# Altium PCB Brake_Light.PcbDoc
Units mm, origin at the board's own origin, x right, y up, seen from the top; angles counter-clockwise.
Board outline 164.75 x 15 mm, 4 copper layers (Top Layer, PWR, GND, Bottom Layer), stack 1.554 mm thick; 31 components, 22 nets, 81 pads, 189 vias.
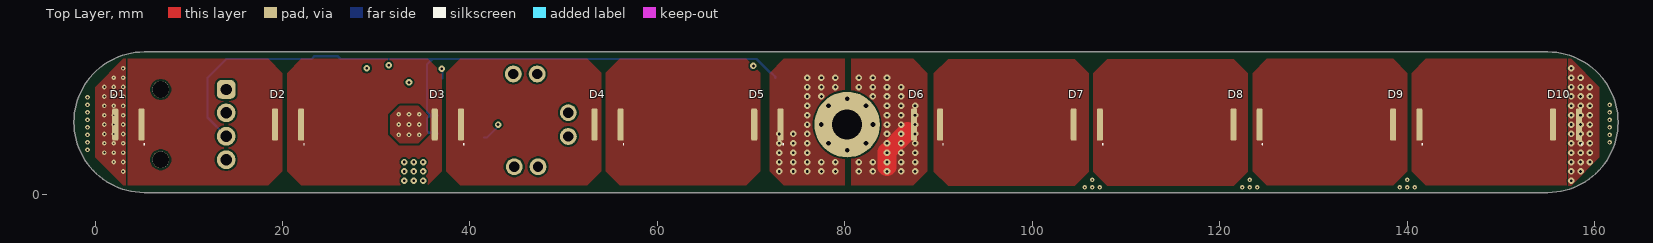
[diagram p0: Top Layer view]
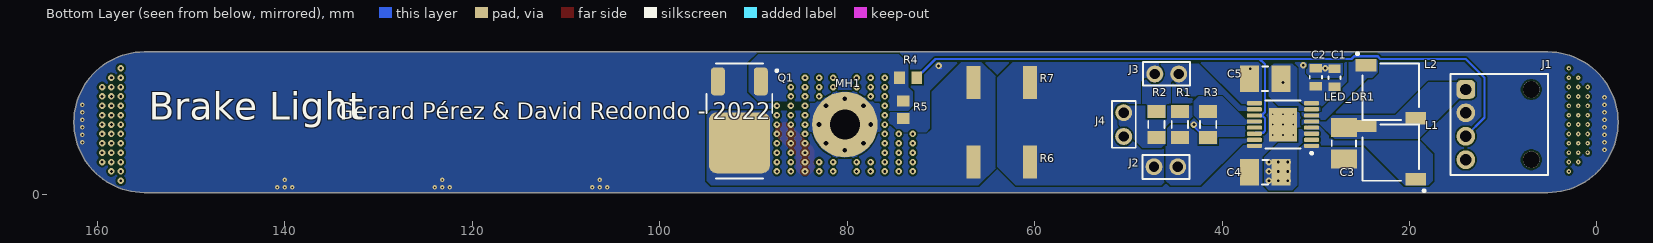
[diagram p1: Bottom Layer view, seen from below]
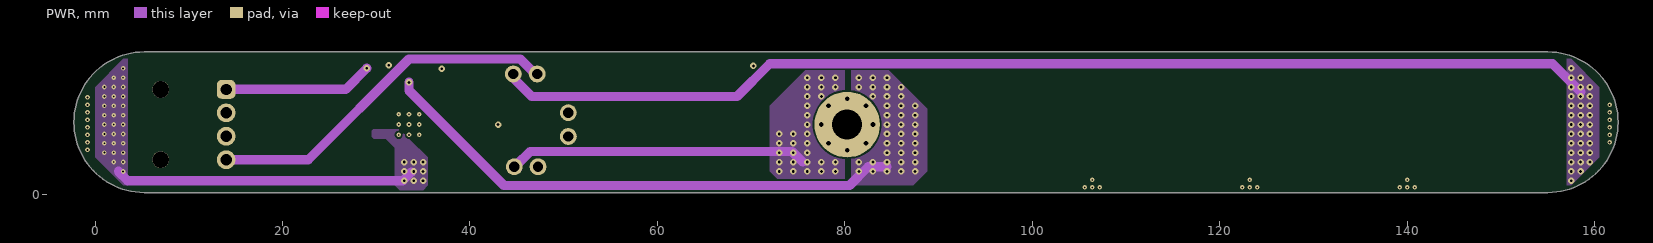
[diagram p2: PWR]
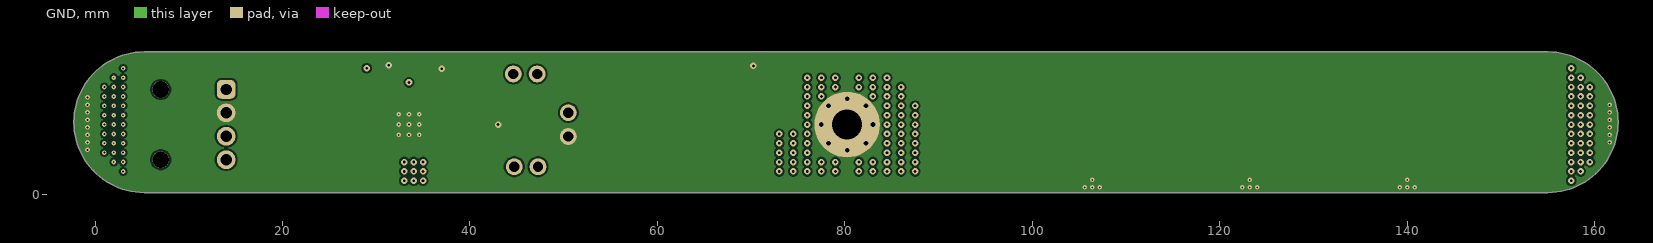
[diagram p3: GND]
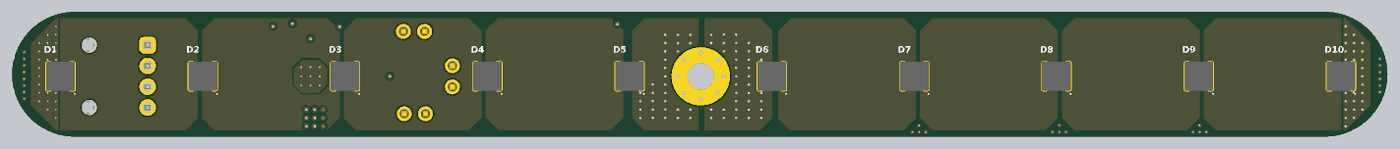
[diagram p4: 3D render of the assembled board from above, using the file's embedded part models]
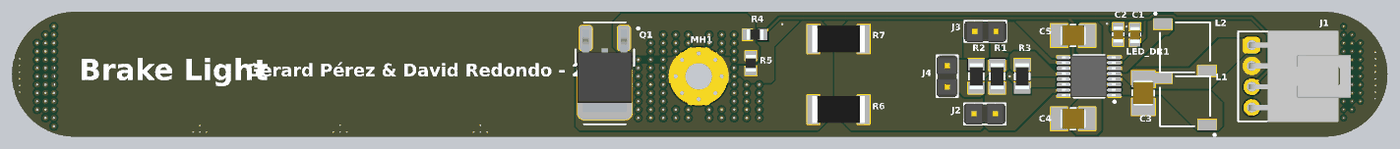
[diagram p5: 3D render of the assembled board from below, using the file's embedded part models]

## Layer stack, top to bottom
Top Solder: solder mask 0.01, Solder Resist, Dk 3.5
Top Layer: signal copper 0.035
Dielectric 2: prepreg 0.2, PP-006, Dk 4.1
PWR: signal copper 0.017
Dielectric 1: dielectric 1.05, FR-4, Dk 4.8
GND: signal copper 0.017
Dielectric 3: prepreg 0.2, PP-006, Dk 4.1
Bottom Layer: signal copper 0.035
Bottom Solder: solder mask 0.01, Solder Resist, Dk 3.5

## Board outline
5.25,0.25 cw(c5.25,7.75) 5.25,15.25 155,15.25 cw(c155,7.75) 155,0.25

## Design rules (kind name [scope] priority, off if disabled: settings)
Clearance [All] p1: gap=0.2 ignorepadtopadclearanceinfootprint=FALSE
HoleSize [All] p1: absolutevalues=TRUE maxlimit=5 minlimit=0.025 maxpercent=80.000 minpercent=20.000
PolygonConnect [All] p1: connectstyle=Direct reliefconductorwidth=0.254 reliefentries=4 polygonreliefangle="90 Angle" airgapwidth=0.254
RoomDefinition Brake_Light [InComponentClass('Brake_Light')] p1: confinementstyle=ConfineIn formatcopy=TRUE lockcomponents=FALSE outline 0,0 160.5,0 160.5,15.5 0,15.5
RoutingVias [All] p1: holewidth=0.3 width=0.7 viastyle="Through Hole" minholewidth=0.2 minwidth=0.5 maxholewidth=5 maxwidth=7
SolderMaskExpansion [All] p1: expansion=0.102 istentingtop=FALSE
Width [All] p1: maxlimit=5 minlimit=0.2 preferedwidth=0.5
29 further rules are at their usual default settings.

## Components (designator, comment, footprint, x,y, rotation, side; value= is the part's Value field where it differs from the comment)
C1 "885012207098" C0805FNPC-R 28,12.5 r90 bottom
C2 "885012207103" C0805FNPC-R 30,12.55 r90 bottom
C3 "GRJ32ER71H106KE11L" C10u-50V-1210FNPMLCC-X7R 27,5.5 r90 bottom
C4 "GRJ32ER71H106KE11L" C10u-50V-1210FNPMLCC-X7R 35.4,2.4 r180 bottom
C5 "GRJ32ER71H106KE11L" C10u-50V-1210FNPMLCC-X7R 35.4,12.4 r180 bottom
D1 "150353RS74500" LED_3535_WE 3.556,7.5 r180 top
D2 "150353RS74500" LED_3535_WE 20.599,7.5 r180 top
D3 "150353RS74500" LED_3535_WE 37.642,7.5 r180 top
D4 "150353RS74500" LED_3535_WE 54.685,7.5 r180 top
D5 "150353RS74500" LED_3535_WE 71.728,7.5 r180 top
D6 "150353RS74500" LED_3535_WE 88.772,7.5 r180 top
D7 "150353RS74500" LED_3535_WE 105.815,7.5 r180 top
D8 "150353RS74500" LED_3535_WE 122.858,7.5 r180 top
D9 "150353RS74500" LED_3535_WE 139.901,7.5 r180 top
D10 "150353RS74500" LED_3535_WE 156.944,7.5 r180 top
J1 "1053131204" J_NanoFit_1x4 10.5,7.5 r90 bottom
J2 "61300211121" J_Pinheader_1x2 46,3 r0 bottom
J3 "61300211121" J_Pinheader_1x2 45.9,12.9 r180 bottom
J4 "61300211121" J_Pinheader_1x2 50.5,7.5 r270 bottom
L1 "CDC5D23BNP-470KC" L_47u-490mA_CF 22,4.5 r0 bottom
L2 "CDC5D23BNP-470KC" L_47u-490mA_CF 22,11 r180 bottom
LED_DR1 "LT3466" LED_Driver_300mA_2Outputs 33.5,7.5 r0 bottom
MH1 "Mounting_Hole_M3" Mounting_Hole_M3 80.25,7.5 r180 bottom
Q1 "SQ2318BES-T1_GE3" TRT-NCH-D2PAK 91.5,8 r0 bottom
R1 "R68m-1206FTK" R1206FTK-W 44.5,7.5 r90 bottom
R2 "R68m-1206FTK" R1206FTK-W 47,7.5 r270 bottom
R3 "CRCW120610K0FKEA" R1206FTK-W 41.5,7.5 r90 bottom
R4 "CR0805-JW-102ELF" R0805FTK 73.5,12.5 r0 bottom
R5 "CR0805-JW-103ELF" R0805FTK 74,9.075 r90 bottom
R6 "352115RFT" R2512FTK 63.5,3.5 r180 bottom value=15R
R7 "352115RFT" R2512FTK 63.5,12 r180 bottom value=15R

## Footprints (in the part's own frame and the unit in brackets; to place one, negate y for a bottom-side part, rotate by r counter-clockwise, add the part's x,y. Pads: shape width x height; smd on the part's side, far side on the other; paste and mask are expansions set on the pad)
C10u-50V-1210FNPMLCC-X7R [mm]
  rect 2x2.8 smd: 1(-1.675,0) 2(1.675,0)
  silkscreen extent -0.33,-1.3 0.33,1.3, body extent -1.6,-1.25 1.6,1.25, height 2.78
C0805FNPC-R [mm]
  rect 0.9x1.3 smd: 1(-0.95,0) 2(0.95,0)
  silkscreen extent -0.15,-0.65 0.15,0.65, body extent -1.03,-0.63 0.97,0.63, height 0.96
J_NanoFit_1x4 [mm]
  rrect50% 2x2 hole 1.2: 1(3.75,3.492)
  round 2 hole 1.2: 2(1.25,3.492) 3(-1.25,3.492) 4(-3.75,3.492)
  round 1.8 hole 1.8: 5(-3.75,-3.492) 5(3.743,-3.492)
  silkscreen extent -5.4,-5.27 5.39,5.14, body extent -5.47,-8.35 5.47,3.81, height 6.35
J_Pinheader_1x2 [mm]
  round 1.8 hole 1.1: 1(-1.27,0) 2(1.27,0)
  silkscreen extent -2.52,-1.25 2.48,1.29, body extent -2.54,-1.27 2.54,1.27, height 9.5
L_47u-490mA_CF [mm] "Precision Wire Wound Inductor, 2-Leads, Body 5,80x5,80mm, IPC Medium Density"
  rect 2.2x1.3 smd: 1(-2.65,2.825) 2(2.643,-2.832)
  silkscreen extent -3.67,-3 3,4.17, body extent -3,-3 3,3, height 2.5
LED_3535_WE [mm] "DFN, 2-Leads, Body 3,25x3,25mm, Pitch 2,28mm, IPC Medium Density"
  rrect50% 0.65x3.45 smd: A(1.397,0) K(-1.397,0)
  silkscreen extent -1.75,2.05 -1.65,2.15, body extent -1.73,-1.73 1.73,1.73, height 2.1
LED_Driver_300mA_2Outputs [mm] "TSOP, 16-Leads, Body 5,00x4,40mm, Pitch 0,65mm, Thermal Pad 3,58x2,94mm, IPC Low Density"
  rrect50% 1.6x0.45 smd: 1(-3.05,2.275) 2(-3.05,1.625) 3(-3.05,0.975) 4(-3.05,0.325) 5(-3.05,-0.325) 6(-3.05,-0.975) 7(-3.05,-1.625) 8(-3.05,-2.275) 9(3.05,-2.275) 10(3.05,-1.625) 11(3.05,-0.975) 12(3.05,-0.325) 13(3.05,0.325) 14(3.05,0.975) 15(3.05,1.625) 16(3.05,2.275)
  rect 2.94x3.58 smd: 17(0,0)
  silkscreen extent -3.17,-2.55 1.85,3.17, body extent -3.17,-2.5 3.23,2.5, height 1.11
Mounting_Hole_M3 [mm]
  round 7 hole 3.2: 1(0,0)
R0805FTK [mm] "Chip Resistor, 2-Leads, Body 2,00x1,25mm, IPC Medium Density"
  rect 1.15x1.35 smd: 1(-0.925,0) 2(0.925,0)
  body extent -1,-0.63 1,0.63, height 0.65
R1206FTK-W [mm] "Chip Resistor, 2-Leads, Body 3,15x1,60mm, IPC Medium Density"
  rect 1.4x1.95 smd: 1(-1.4,0) 2(1.4,0)
  silkscreen extent -0.4,-0.87 0.4,0.87, body extent -1.58,-0.8 1.58,0.8, height 0.61
R2512FTK [mm]
  rect 1.5x3.5 smd: 1(-3,0) 2(3,0)
  body extent -3.15,-1.6 3.15,1.6, height 0.66
TRT-NCH-D2PAK [mm] "SOT23, 3-Leads, Body 2,90x2,80mm, Pitch 0,95mm, IPC Low Density"
  rrect25% 6.5x6.5 smd: D(0,2.45)
  rrect50% 1.5x3 smd: G(-2.286,-4.1) S(2.286,-4.1)
  silkscreen extent -4.12,-6 3.5,6.25, body extent -3.29,-5.12 3.29,4.8, height 2.29

## Part data
C1: library part C100n-50V-0805FNPC-X7R, "Cap, 0.1ΜF, 50V, 10%, X7R, 0805", Capacitance=100nF, Case Code (Imperial)=0805, Case Code (Metric)=2012, Dielectric=X7R, Manufacturer 1="Wurth Electronics", Max Operating Temperature=125°C, Min Operating Temperature=-55°C, Supplier Part Number 1=1813493, Tolerance=10%, Voltage Rating=50V, .Creator=DR, Case/Package=0805, Category="Ceramic Capacitors", ComponentLink1Description=http://www.farnell.com/datasheets/1958498.pdf?src-supplier=Farnell, ComponentLink1URL=http://www.farnell.com/datasheets/1958498.pdf?src-supplier=Farnell, ComponentLink2Description=http://www.farnell.com/datasheets/1958498.pdf?src-supplier=Element14, ComponentLink2URL=http://www.farnell.com/datasheets/1958498.pdf?src-supplier=Element14, ComponentLink3Description=https://katalog.we-online.de/pbs/datasheet/885012207098.pdf?src-supplier=Digi-Key, ComponentLink3URL=https://katalog.we-online.de/pbs/datasheet/885012207098.pdf?src-supplier=Digi-Key, ComponentLink4Description=http://www.farnell.com/datasheets/1958498.pdf?src-supplier=Newark, ComponentLink4URL=http://www.farnell.com/datasheets/1958498.pdf?src-supplier=Newark, Length=0.079inch, Manufacturer Part Number 1=885012207098, Mount="Surface Mount", Packaging="Cut Tape", Pricing 1="100=0,10200, 500=0,07100, 2000=0,06100 (GBP)", REACH SVHC=Unknown, RoHS=Yes, RoHS Compliant=Yes, Stock 1=8000, Supplier 1=RSComponents, Thickness=0.035inch, Voltage Rating (DC)=50V, Width=0.049inch
C2: library part C1u-50V-0805FNPC-X7R, "Multilayer Ceramic Capacitor, Wcap-Csgp Series, 1 F, 10%, X7R, 50 V, 0805 [2012 Metric] Rohs Compliant: Yes", Capacitance=1uF, Case Code (Imperial)=0805, Case Code (Metric)=2012, Dielectric=X7R, Manufacturer 1="Wurth Electronics", Max Operating Temperature=85°C, Min Operating Temperature=-55°C, Supplier Part Number 1=1813523, Tolerance=10%, Voltage Rating=50V, .Creator=GP, Case/Package=0805, Category="Ceramic Capacitors", ComponentLink1Description=http://www.farnell.com/datasheets/1958501.pdf?src-supplier=Farnell, ComponentLink1URL=http://www.farnell.com/datasheets/1958501.pdf?src-supplier=Farnell, ComponentLink2Description=http://www.farnell.com/datasheets/1958501.pdf?src-supplier=Element14, ComponentLink2URL=http://www.farnell.com/datasheets/1958501.pdf?src-supplier=Element14, ComponentLink3Description=https://katalog.we-online.de/pbs/datasheet/885012107003.pdf?src-supplier=Digi-Key, ComponentLink3URL=https://katalog.we-online.de/pbs/datasheet/885012107003.pdf?src-supplier=Digi-Key, ComponentLink4Description=http://www.farnell.com/datasheets/1958501.pdf?src-supplier=Newark, ComponentLink4URL=http://www.farnell.com/datasheets/1958501.pdf?src-supplier=Newark, Length=0.079inch, Manufacturer Part Number 1=885012207103, Mount="Surface Mount", Packaging="Cut Tape", Pricing 1="50=0,27200, 250=0,25300, 500=0,22800, 1250=0,20100, 2500=0,17100 (GBP)", REACH SVHC=Unknown, RoHS=Yes, RoHS Compliant=Yes, Stock 1=5100, Supplier 1=RSComponents, Thickness=0.053inch, Voltage Rating (DC)=50V, Width=0.049inch
C3 C4 C5: library part C10u-50V-1210FNPMLCC-X7R, "Multilayer Ceramic Capacitors MLCC - SMD/SMT 1210 10uF 50volts X7R +/-10% Soft Term", Capacitance=10uF, Case Code (Imperial)=1210, Case Code (Metric)=3225, Manufacturer=Murata, Max Operating Temperature=125°C, Min Operating Temperature=-55°C, Tolerance=10%, Voltage Rating=50V, .Creator=DR, Case/Package=1210, Category="Ceramic Capacitors", ComponentLink1Description=Datasheet, ComponentLink1URL=https://eu.mouser.com/datasheet/2/281/GRJ32ER71H106KE11_01-1977929.pdf, Features="Soft Termination", Length=0.126inch, Manufacturer part number=GRJ32ER71H106KE11L, Mount="Surface Mount", Packaging="Tape and Reel", Pricing 1="1000=0,33327, 2000=0,32389, 4000=0,31450, 6000=0,30511, 8000=0,29572 (USD)", RoHS=Yes, RoHS Compliant=Yes, Stock 1=19000, Supplier 1=Avnet, Supplier Part Number 1=GRJ32ER71H106KE11L, Thickness=0.11inch, Width=0.098inch
D1 D2 D3 D4 D5 D6 D7 D8 D9 D10: library part LEDRS-3535-55, "High Brightness Led, Wl-Smdc Series, 625 Nm, Red, 55 Lm, 350 Ma", Case/Package=SMD/SMT, Color=Red, Forward Current=700mA, Forward Voltage=2.2V, Manufacturer="Wurth Electronics", Supplier Part Number 1=9008911, Test Current=350mA, Test Temperature=25°C, Thermal Resistance of Package=10°C/W, .Creator=GP, ComponentLink1Description=http://www.farnell.com/datasheets/1886833.pdf?src-supplier=Farnell, ComponentLink1URL=http://www.farnell.com/datasheets/1886833.pdf?src-supplier=Farnell, ComponentLink2Description=http://www.farnell.com/datasheets/1886833.pdf?src-supplier=Element14, ComponentLink2URL=http://www.farnell.com/datasheets/1886833.pdf?src-supplier=Element14, ComponentLink3Description="Where buy it", ComponentLink3URL=https://www.we-online.com/catalog/en/WL-SMDC?sq=150353rs74500&sp=https%3A%2F%2Fwww.we-online.com%2Fweb%2Fen%2Fwuerth_elektronik%2Fsearchpage.php%3Fsearch%3D150353rs74500#150353RS74500, Luminous Flux=55lm, Manufacturer part number=150353RS74500, Max Current Rating=700mA, Mount="Surface Mount", Packaging="Cut Tape", Pricing 1="5=1,40500 (USD)", REACH SVHC=Unknown, RoHS=Yes, RoHS Compliant=Yes, Stock 1=1, Supplier 1=RSComponents, Viewing Angle=125°, Wavelength=625nm
J1: library part J_NanoFit_1x4, "Nano-Fit Right Angle Header; Through Hole; 2.50mm; Single Row; 4 Circuit; Gold Plated", Color=Black, Manufacturer=Molex, Manufacturer part number=105313-1204, Supplier Part Number 1=1225085, .Creator=DO, Category="Headers and Wire Housings", ComponentLink1Description=http://www.farnell.com/datasheets/2216599.pdf?src-supplier=Farnell, ComponentLink1URL=http://www.farnell.com/datasheets/2216599.pdf?src-supplier=Farnell, ComponentLink2Description=http://www.farnell.com/datasheets/2216599.pdf?src-supplier=Element14, ComponentLink2URL=http://www.farnell.com/datasheets/2216599.pdf?src-supplier=Element14, ComponentLink3Description=http://www.farnell.com/datasheets/2216599.pdf?src-supplier=Newark, ComponentLink3URL=http://www.farnell.com/datasheets/2216599.pdf?src-supplier=Newark, ComponentLink4Description=https://www.molex.com/pdm_docs/sd/1053131102_sd.pdf?src-supplier=Digi-Key, ComponentLink4URL=https://www.molex.com/pdm_docs/sd/1053131102_sd.pdf?src-supplier=Digi-Key, Contact Material=Brass, Contact Plating=Gold, Gender=Male, Mount="Through Hole", Number of Rows=1, Pricing 1="10=1,14100, 50=0,65100, 100=0,63400, 250=0,61700, 500=0,60100 (GBP)", REACH SVHC=Unknown, RoHS=Yes, RoHS Compliant=Yes, Stock 1=286, Supplier 1=RSComponents, Termination="Through Hole"
J2 J3 J4: library part J_Jumper, "CONN HEADER 2 POS 2.54", Color=Black, Current Rating=3A, Manufacturer=Molex, Max Operating Temperature=125°C, Maximum current="3 A", Maximum voltage="250 V AC", Min Operating Temperature=-40°C, Supplier Part Number 1=8281581, Temperature rating="-40° to +105°C", Voltage Rating=250V, .Creator=GP, Application=Shortcircuit, Category=Connector, Category type=PCB-PCB, ComponentLink1Description=Datasheet, ComponentLink1URL=https://www.we-online.com/catalog/datasheet/61300211121.pdf, ComponentLink2Description="Where buy it", ComponentLink2URL=https://www.we-online.com/catalog/en/PHD_2_54_THT_PIN_HEADER_6130XX11121?sq=61300211121&sp=https%3A%2F%2Fwww.we-online.com%2Fweb%2Fen%2Fwuerth_elektronik%2Fsearchpage.php%3Fsearch%3D61300211121#61300211121, ComponentLink3Description=https://datasheet.ciiva.com/13619/6130xx11121-48870-13619345.pdf?src-supplier=Mouser, ComponentLink3URL=https://datasheet.ciiva.com/13619/6130xx11121-48870-13619345.pdf?src-supplier=Mouser, Connections=1x2, Connector Type="Male Pin", Contact Gender=Male, Contact Material="Copper Alloy,Copper", Contact Mating Length=0.236inch, Contact Plating=Gold, Flammability=94V-0, Gender=Male, Housing Material=PBT, Lead Free="Lead Free", Manufacturer part number=61300211121, Mount="Through hole", Number of Contacts=2, Number of Positions=2, Number of Rows=1, Orientation=Vertical, Packaging=Bulk, Pitch=0.1inch, Pricing 1="5=0,14100, 50=0,09700, 100=0,07800, 200=0,07300, 500=0,06800 (USD)", Product name="Pin Header", REACH SVHC=Unknown, Stock 1=1855, Supplier="Würth Elektronik", Supplier 1=RSComponents, Termination="Through Hole"
L1 L2: library part L_47u-490mA_CF, "Inductor Power Unshielded Wirewound 47uH 10% 100KHz Ferrite 490mA 546mOhm DCR T/R", Case/Package=Nonstandard, Current Rating=490mA, DC Resistance (DCR)=546mR, Inductance=47uH, Manufacturer=Sumida, Max Operating Temperature=100°C, Min Operating Temperature=-40°C, Package Quantity=2000, Supplier Part Number 1=851-CDC5D23BNP-470KC, Test Frequency=100kHz, Tolerance=10%, .Creator=GP, Category="Fixed Inductors", ComponentLink1Description=http://www.mouser.com/ds/2/390/CDC5D23B-465898.pdf?src-supplier=Mouser, ComponentLink1URL=http://www.mouser.com/ds/2/390/CDC5D23B-465898.pdf?src-supplier=Mouser, ComponentLink3Description=http://products.sumida.com/products/pdf/CDC5D23B.pdf?src-supplier=Digi-Key, ComponentLink3URL=http://products.sumida.com/products/pdf/CDC5D23B.pdf?src-supplier=Digi-Key, Core Material=Ferrite, Height=2.5mm, Height - Seated (Max)=0.098inch, Lead Free="Lead Free", Length=0.228inch, Manufacturer part number=CDC5D23BNP-470KC, Max DC Current=490mA, Mount="Surface Mount", Packaging="Tape and Reel", Pricing 1="1=0,95000, 10=0,71100, 50=0,71100, 100=0,59700, 1000=0,40600, 10000=0,38100 (USD)", RoHS=Yes, RoHS Compliant=Yes, Series=CDC5D23B, Shielding=Unshielded, Stock 1=3779, Supplier 1=Mouser, Termination=SMD/SMT, Weight=0.007584oz, Width=5.8mm
LED_DR1: library part LED_Driver_300mA_2Outputs, "LT3466 - Dual Full Function White LED Step-Up Converter with Built-In Schottky Diodes", Manufacturer="Analog Devices / Linear Technology", Manufacturer part number=LT3466EFE, Max Operating Temperature=85°C, Max Supply Voltage=24V, Min Input Voltage=2.7V, Min Operating Temperature=-40°C, .Creator=GP, ComponentLink1Description=Datasheet, ComponentLink1URL=https://eu.mouser.com/datasheet/2/609/3466fa-1271503.pdf, ComponentLink2Description="Where buy it", Min Supply Voltage=2.7V, Number of Pins=16, Number of Segments=20, RoHS=No, RoHS Compliant=No, Supplier 1="Arrow Electronics", Supplier Part Number 1=LT3466EFE, Topology=Boost
Q1: library part TRT-NCH-31/100, "MOSFET N-CH 100V 31A DPAK", Case/Package=TO-252-3, Continuous Drain Current (ID)=31A, Drain to Source Breakdown Voltage=100V, Drain to Source Resistance=39mR, Gate to Source Voltage (Vgs)=20V, Input Capacitance=1.69nF, Manufacturer 1=Infineon, Manufacturer Part Number 1=IRFR3410TRPBF, Max Operating Temperature=175°C, Max power dissipation=3W, Min Operating Temperature=-55°C, Power Dissipation=110W, Supplier Part Number 1=2468036, Threshold Voltage=4V, Category=MOSFETs, ComponentLink2Description=Datasheet, ComponentLink2URL=https://www.mouser.es/datasheet/2/427/sq2318bes-1868475.pdf, Drain to Source Voltage (Vdss)=100V, Halogen Free="Halogen Free", Height=0.094inch, Lead Free="Contains Lead", Length=0.264inch, Max Dual Supply Voltage=100V, Mount="Surface Mount", Number of Pins=3, Packaging="Cut Tape", Polarization=N, Pricing 1="1=1,20000, 10=1,08000, 100=0,84200, 500=0,69600 (EUR)", Rds On Max=39mR, Reach SVHC Compliant=Yes, RoHS=Yes, RoHS Compliant=Yes, Series=HEXFET®, Stock 1=4070, Supplier 1=Farnell, Turn-Off Delay Time=40ns, Turn-On Delay Time=12ns, Width=0.245inch
R1 R2: "Thick Film Surface Mount Chip Resistor 1206 Size 0.68 Ohm 5% 0.5 W ±100 ppm/°C 2-Pin SMD T/R", Case/Package=1206, Manufacturer 1=Vishay, Manufacturer Part Number 1=RCWE1206R680JKEA, Max Operating Temperature=155°C, Max power dissipation=500mW, Min Operating Temperature=-55°C, Resistance=680mR, Resistor Type="Thick Film", Temperature Coefficient=100ppm/°C, Tolerance=5%, Category="Chip SMD Resistors", ComponentLink1Description=http://www.vishay.com/docs/20019/rcwe.pdf?src-supplier=Digi-Key, ComponentLink1URL=http://www.vishay.com/docs/20019/rcwe.pdf?src-supplier=Digi-Key, Depth=1.6mm, Features="Moisture Resistant,Automotive AEC-Q200", Height=0.028inch, Length=0.122inch, Military Standard=Not, Number of Terminations=2, Packaging="Tape and Reel", Pricing 1="5000=0,23581, 10000=0,22825, 20000=0,22069, 30000=0,21313, 40000=0,20488, 50000=0,19525, 500000=0,18563 (USD)", RoHS=Yes, RoHS Compliant=Yes, Supplier 1=Avnet, Supplier Part Number 1=RCWE1206R680JKEA, Width=0.063inch
R3: library part R51k-1206FTK, "Res Thick Film 1206 51K Ohm 1% 1/4W ±100ppm/°C Molded SMD SMD Punched Carrier T/R", Case Code (Imperial)=1206, Case Code (Metric)=3216, Current Rating=2A, Manufacturer=Panasonic, Manufacturer part number=ERJ-S08F5102V, Max Operating Temperature=155°C, Max power dissipation=250mW, Min Operating Temperature=-55°C, Package Quantity=5000, Resistance=51kR, Resistor Type="Thick Film", Supplier Part Number 1=667-ERJ-S08F5102V, Temperature Coefficient=100ppm/°C, Tolerance=1%, Voltage Rating=150V, Voltage Rating (DC)=200V, .Creator=DO, Case/Package=1206, Category=Resistor, ComponentLink1Description=Datasheet, ComponentLink1URL=https://docs.rs-online.com/bca8/A700000006404581.pdf, ComponentLink2Description="Where buy it", ComponentLink2URL=https://es.rs-online.com/web/p/resistencias-de-montaje-en-superficie/6791765, ComponentLink3Description=https://datasheet.ciiva.com/24023/aoa0000ce5-24023518.pdf?src-supplier=Mouser, ComponentLink3URL=https://datasheet.ciiva.com/24023/aoa0000ce5-24023518.pdf?src-supplier=Mouser, ComponentLink4Description=https://datasheet.ciiva.com/9189/aoa0000ce5-9189211.pdf?src-supplier=Avnet, ComponentLink4URL=https://datasheet.ciiva.com/9189/aoa0000ce5-9189211.pdf?src-supplier=Avnet, Construction=Rectangular, Contact Plating=Tin, Depth=1.6mm, Features=Anti-Sulfur, Height=0.028inch, Lead Free="Lead Free", Length=3.2mm, Military Standard=Not, Mount="Surface Mount", Number of Terminations=2, Packaging="Tape and Reel", Power rating=250mW, Pricing 1="1=0,31000, 10=0,26700, 50=0,26700, 100=0,10700, 1000=0,05100, 10000=0,03400 (USD)", RoHS=Yes, RoHS Compliant=Yes, Series=ERJ, Stock 1=4091, Supplier 1=Mouser, Width=0.063inch
R4: library part R1k-0805FTK, "Res Thick Film 0805 1K Ohm 5% 1/8W ±200ppm/°C Molded SMD SMD Paper Tape on Plastic Reel", Case Code (Imperial)=0805, Case Code (Metric)=2012, Manufacturer 1=Bourns, Max Operating Temperature=155°C, Max power dissipation=125mW, Min Operating Temperature=-55°C, Package Quantity=1, Resistance=1kR, Resistor Type="Thick Film", Temperature Coefficient=200ppm/°C, Tolerance=5%, Voltage Rating=150V, .Creator=GP, Case/Package=0805, Category="Chip SMD Resistors", ComponentLink1Description=https://datasheet.ciiva.com/11821/0900766b80fcdb72-11821134.pdf?src-supplier=RSComponents, ComponentLink1URL=https://datasheet.ciiva.com/11821/0900766b80fcdb72-11821134.pdf?src-supplier=RSComponents, ComponentLink2Description=https://datasheet.ciiva.com/15225/getdatasheetpartid-78155-15225381.pdf?src-supplier=Verical, ComponentLink2URL=https://datasheet.ciiva.com/15225/getdatasheetpartid-78155-15225381.pdf?src-supplier=Verical, ComponentLink3Description=https://datasheet.ciiva.com/22693/1902866-22693253.pdf?src-supplier=Element14, ComponentLink3URL=https://datasheet.ciiva.com/22693/1902866-22693253.pdf?src-supplier=Element14, ComponentLink4Description=https://datasheet.ciiva.com/7986/1856384-7986184.pdf?src-supplier=Element14, ComponentLink4URL=https://datasheet.ciiva.com/7986/1856384-7986184.pdf?src-supplier=Element14, ComponentLink5Description=https://datasheet.ciiva.com/7985/1856384-7985867.pdf?src-supplier=Element14, ComponentLink5URL=https://datasheet.ciiva.com/7985/1856384-7985867.pdf?src-supplier=Element14, ComponentLink6Description=https://datasheet.ciiva.com/30242/159chpreztr-30242765.pdf?src-supplier=Onlinecomponents.com, ComponentLink6URL=https://datasheet.ciiva.com/30242/159chpreztr-30242765.pdf?src-supplier=Onlinecomponents.com, ComponentLink7Description=https://datasheet.ciiva.com/6547/chpreztr-6547359.pdf?src-supplier=Digi-Key, ComponentLink7URL=https://datasheet.ciiva.com/6547/chpreztr-6547359.pdf?src-supplier=Digi-Key, Contact Plating=Tin, Depth=1.25mm, Features="Moisture Resistant", Height=0.5mm, Lead Free="Lead Free", Length=2mm, Manufacturer Part Number 1=CR0805-JW-102ELF, Military Standard=Not, Mount="Surface Mount", Number of Pins=2, Number of Terminations=2, Packaging="Tape and Reel", Power rating=125mW, Pricing 1="1=0,05930, 10=0,03510, 25=0,01790, 100=0,00800, 250=0,00790, 500=0,00590, 1000=0,00360, 3000=0,00350, 6000=0,00250 (USD)", Radiation Hardening=No, REACH SVHC="No SVHC", RoHS=Yes, Stock 1=27510, Supplier 1="Arrow Electronics", Supplier Part Number 1=CR0805-JW-102ELF, Termination=SMD/SMT, Thickness=508um, Voltage Rating (DC)=150V, Width=1.25mm
R5: library part R10k-0805FTK, "BOURNS         CR0805-JW-103ELF            Surface Mount Chip Resistor, Thick Film, CR Series, 10 kohm, 125 mW,  5%, 150 V", Case Code (Imperial)=0805, Case Code (Metric)=2012, Manufacturer 1=Bourns, Max Operating Temperature=155°C, Max power dissipation=125mW, Min Operating Temperature=-55°C, Package Quantity=1, Resistance=10kR, Resistance Tolerance=5%, Resistor Type="Thick Film", Temperature Coefficient=200ppm/°C, Voltage Rating=150V, Voltage Rating (DC)=100V, .Creator=DR, Case/Package=0805, Category="Chip SMD Resistors", ComponentLink1Description=https://datasheet.ciiva.com/11821/0900766b80fcdb72-11821135.pdf?src-supplier=RSComponents, ComponentLink1URL=https://datasheet.ciiva.com/11821/0900766b80fcdb72-11821135.pdf?src-supplier=RSComponents, ComponentLink2Description=https://datasheet.ciiva.com/9122/chpreztr-9122374.pdf?src-supplier=Avnet, ComponentLink2URL=https://datasheet.ciiva.com/9122/chpreztr-9122374.pdf?src-supplier=Avnet, ComponentLink3Description=https://datasheet.ciiva.com/22693/1902866-22693254.pdf?src-supplier=Element14, ComponentLink3URL=https://datasheet.ciiva.com/22693/1902866-22693254.pdf?src-supplier=Element14, ComponentLink4Description=https://datasheet.ciiva.com/7986/691949-7986187.pdf?src-supplier=Element14, ComponentLink4URL=https://datasheet.ciiva.com/7986/691949-7986187.pdf?src-supplier=Element14, ComponentLink5Description=https://datasheet.ciiva.com/30065/159chpreztr-30065976.pdf?src-supplier=Onlinecomponents.com, ComponentLink5URL=https://datasheet.ciiva.com/30065/159chpreztr-30065976.pdf?src-supplier=Onlinecomponents.com, ComponentLink6Description=https://datasheet.ciiva.com/16783/70154685-16783482.pdf?src-supplier=Allied+Electronics, ComponentLink6URL=https://datasheet.ciiva.com/16783/70154685-16783482.pdf?src-supplier=Allied+Electronics, ComponentLink7Description=https://datasheet.ciiva.com/5548/chpreztr-5548491.pdf?src-supplier=Mouser, ComponentLink7URL=https://datasheet.ciiva.com/5548/chpreztr-5548491.pdf?src-supplier=Mouser, ComponentLink8Description=https://datasheet.ciiva.com/6559/chpreztr-6559900.pdf?src-supplier=Digi-Key, ComponentLink8URL=https://datasheet.ciiva.com/6559/chpreztr-6559900.pdf?src-supplier=Digi-Key, ComponentLink9Description=https://datasheet.ciiva.com/6559/chpreztr-6559901.pdf?src-supplier=Digi-Key, ComponentLink9URL=https://datasheet.ciiva.com/6559/chpreztr-6559901.pdf?src-supplier=Digi-Key, ComponentLink10Description=https://datasheet.ciiva.com/7985/1856384-7985869.pdf?src-supplier=Element14, ComponentLink10URL=https://datasheet.ciiva.com/7985/1856384-7985869.pdf?src-supplier=Element14, ComponentLink11Description=https://datasheet.ciiva.com/48692/001055517-da-01-en-smd-wid-cr0805-jw-103elf-10k-ohm-1-8w-48692118.pdf?src-supplier=Conrad, ComponentLink11URL=https://datasheet.ciiva.com/48692/001055517-da-01-en-smd-wid-cr0805-jw-103elf-10k-ohm-1-8w-48692118.pdf?src-supplier=Conrad, Construction=Rectangular, Contact Plating=Tin, Depth=1.25mm, Features="Moisture Resistant", Height=0.5mm, Length=2mm, Manufacturer Part Number 1=CR0805-JW-103ELF, Military Standard=Not, Mount="Surface Mount", Number of Pins=2, Number of Terminations=2, Packaging="Tape and Reel", Power rating=125mW, Pricing 1="1=0,05790, 10=0,01540, 25=0,01340, 100=0,00340 (USD)", Radiation Hardening=No, REACH SVHC="No SVHC", RoHS=Yes, RoHS Compliant=Yes, Series=CR0805, Stock 1=57566, Supplier 1="Arrow Electronics", Supplier Part Number 1=CR0805-JW-103ELF, Technology="THICK FILM", Termination=SMD/SMT, Thickness=508um, Tolerance=5%, Width=1.25mm
R6 R7: library part R15-2512FTK, "Res Thick Film 2512 15 Ohm 1% 2W ±100ppm/C Pad SMD T/R", Case Code (Imperial)=2512, Case Code (Metric)=6432, Manufacturer 1="TE Connectivity", Max Operating Temperature=155°C, Max power dissipation=2W, Min Operating Temperature=-55°C, Number of Resistors=1, Resistance Tolerance=1%, Resistor Type="Thick Film,Power resistor", Supplier Part Number 1=7551110P, Temperature Coefficient=100ppm/°C, Voltage Rating=250V, .Creator=DR, Case/Package=2512, Category="Chip SMD Resistors", ComponentLink1Description=Datasheet, ComponentLink1URL=https://docs.rs-online.com/8bc1/0900766b81096b90.pdf, ComponentLink2Description="Where buy it", ComponentLink2URL=https://es.rs-online.com/web/p/resistencias-de-montaje-en-superficie/7551110, ComponentLink3Description=https://datasheet.ciiva.com/25610/0900766b81096b90-25610033.pdf?src-supplier=RSComponents, ComponentLink3URL=https://datasheet.ciiva.com/25610/0900766b81096b90-25610033.pdf?src-supplier=RSComponents, ComponentLink4Description=https://datasheet.ciiva.com/46391/1610601-46391493.pdf?src-supplier=Element14, ComponentLink4URL=https://datasheet.ciiva.com/46391/1610601-46391493.pdf?src-supplier=Element14, ComponentLink5Description=https://datasheet.ciiva.com/7657/1610601-7657542.pdf?src-supplier=Element14, ComponentLink5URL=https://datasheet.ciiva.com/7657/1610601-7657542.pdf?src-supplier=Element14, Depth=3.2mm, ELV=Compliant, Features="Automotive AEC-Q200", Height=0.55mm, Length=6.3mm, Manufacturer Part Number 1=352115RFT, Mount="Surface Mount", Number of Terminations=2, Packaging="Tape and Reel", Pricing 1="10=0,64300, 250=0,62200, 1000=0,60000, 2000=0,55400, 2500=0,52100 (USD)", REACH SVHC="No SVHC", RoHS=Yes, RoHS Compliant=Yes, Series="3521, CGS", Stock 1=1, Supplier 1=RSComponents, Technology="THICK FILM", Termination=Solder, Tolerance=1%, Voltage Rating (DC)=250V

## Via types
v1: diameter 0.7, hole 0.3, Top Layer to Bottom Layer, tented both sides, 116 vias
v2: diameter 0.5, hole 0.2, Top Layer to Bottom Layer, tented both sides, 65 vias
v3: diameter 0.7, hole 0.5, Top Layer to Bottom Layer, tented both sides, 8 vias

## Nets (pads, with @x,y where several pads share a name; then routed paths per layer and width w, separated by ;. In a path a pad name is that pad's centre, name@x,y a point inside that pad or via, vN(x,y) a via of type N, cw(c..) or ccw(c..) an arc to the next point about the centre after c; other vN are vias at no path point)
+VCC: C1.2 C2.2 C3.2 J1.1 L1.2 L2.2 LED_DR1.5 | length 15.9
  PWR w1: J1.1 26.75,11.25 v1(29,13.5)
Control: J1.3 LED_DR1.11 LED_DR1.14 R4.1 | length 80
  Bottom Layer w0.25: J1.3 12,8.243 12,12.5 14,14.5 23.115,14.5 23.415,14.8 25.885,14.8 26.185,14.5 36,14.5 ; LED_DR1.11@35.975,8.475 LED_DR1.11 ; LED_DR1.14 36.464,6.611 35.646,6.611 35.425,6.832 35.425,8.168 35.646,8.389 35.875,8.389 35.889,8.403 35.889,8.561 35.875,8.575 35.681,8.575 35.425,8.831 35.425,13.925 36,14.5 ; R4.1 72.575,12.6 72.125,13.05 72.025,13.05 70.575,14.5 36,14.5
GND: C1.1 C2.1 C3.1 C4.1 C5.1 J1.2 J4.2 LED_DR1.1 LED_DR1.8 LED_DR1.9 LED_DR1.16 LED_DR1.17 MH1.1 Q1.S R3.1 R5.1 | length 3.9
  Bottom Layer w0.2: v1(31.34,13.825) 31.34,13.84 v1@31.5,14 ; v1(37,13.45) 37.075,13.375 C5.1 ; R3.1 41.775,6.1 42.904,7.229 42.904,7.404 v1(43,7.5) ; 70,13.5 70.242,13.742 v1(70.242,13.758)
  other v2: 105.6,0.8 106.4,0.8 107.2,0.8 122.4,0.8 123.2,0.8 124,0.8 139.2,0.8 140,0.8 140.8,0.8 106.4,1.6 123.2,1.6 140,1.6 -0.8,4.8 -0.8,5.6 161.6,5.6 -0.8,6.4 32.4,6.4 33.5,6.4 34.6,6.4 161.6,6.4 -0.8,7.2 161.6,7.2 32.4,7.5 33.5,7.5 34.6,7.5 -0.8,8 161.6,8 32.4,8.6 33.5,8.6 34.6,8.6 -0.8,8.8 161.6,8.8 -0.8,9.6 161.6,9.6 -0.8,10.4
  other v3: 80.25,4.75 78.25,5.5 82.25,5.5 77.5,7.5 83,7.5 78.25,9.5 82.25,9.5 80.25,10.25
LEDs: J1.4 J2.2 J3.1 R6.2 R7.2 | length 38.3
  PWR w1: J1.4 22.75,3.75 33.5,14.5 45.376,14.5 46.976,12.9 J3.1
LEDs_1: D5.K J2.1 LED_DR1.15 R1.1 | length 31.9
  PWR w1: J2.1@45.07,2.84 45.026,2.884 45.026,3.226 46.43,4.63 74.37,4.63 75.5,3.5
  other v1: 73,2.5 74.5,2.5 76,2.5 77.5,2.5 79,2.5 73,3.5 74.5,3.5 76,3.5 77.5,3.5 79,3.5 73,4.5 74.5,4.5 76,4.5 73,5.5 74.5,5.5 76,5.5 73,6.5 74.5,6.5 76,6.5 76,7.5 76,8.5 76,9.5 76,10.5 77.5,10.5 76,11.5 77.5,11.5 79,11.5 76,12.5 77.5,12.5 79,12.5
LEDs_1_Vin: C4.2 D1.A LED_DR1.3 | length 32
  PWR w1: 2.5,2.5 3.5,1.5 5,1.5 32.825,1.5 v1@33.725,2.4
  other v1: 33,1.5 34,1.5 35,1.5 33,2.5 34,2.5 35,2.5 33,3.5 34,3.5 35,3.5
  other v2: 3,2.5 2,3.5 3,3.5 1,4.5 2,4.5 3,4.5 1,5.5 2,5.5 3,5.5 1,6.5 2,6.5 3,6.5 1,7.5 2,7.5 3,7.5 1,8.5 2,8.5 3,8.5 1,9.5 2,9.5 3,9.5 1,10.5 2,10.5 3,10.5 1,11.5 2,11.5 3,11.5 2,12.5 3,12.5 3,13.5
LEDs_2: D10.K J3.2 LED_DR1.10 R2.1 | length 117.8
  PWR w1: J3.2 44.63,12.47 46.6,10.5 68.5,10.5 72,14 155.5,14 158.5,11
  other v1: 157.5,1.5 157.5,2.5 158.5,2.5 157.5,3.5 158.5,3.5 159.5,3.5 157.5,4.5 158.5,4.5 159.5,4.5 157.5,5.5 158.5,5.5 159.5,5.5 157.5,6.5 158.5,6.5 159.5,6.5 157.5,7.5 158.5,7.5 159.5,7.5 157.5,8.5 158.5,8.5 159.5,8.5 157.5,9.5 158.5,9.5 159.5,9.5 157.5,10.5 158.5,10.5 159.5,10.5 157.5,11.5 158.5,11.5 159.5,11.5 157.5,12.5 158.5,12.5 157.5,13.5
LEDs_2_Vin: C5.2 D6.A LED_DR1.7 | length 61.6
  Top Layer w2: 84.5,3 84.5,4.575 86.7,6.775
  PWR w1: v1(33.5,12) 33.5,11.126 43.626,1 80.5,1 82.5,3 84.5,3
  other v1: 81.5,2.5 83,2.5 84.5,2.5 86,2.5 87.5,2.5 81.5,3.5 83,3.5 84.5,3.5 86,3.5 87.5,3.5 84.5,4.5 86,4.5 87.5,4.5 84.5,5.5 86,5.5 87.5,5.5 84.5,6.5 86,6.5 87.5,6.5 84.5,7.5 86,7.5 87.5,7.5 84.5,8.5 86,8.5 87.5,8.5 84.5,9.5 86,9.5 87.5,9.5 83,10.5 84.5,10.5 86,10.5 81.5,11.5 83,11.5 84.5,11.5 86,11.5 81.5,12.5 83,12.5 84.5,12.5
NetD1_K: D1.K D2.A
NetD2_K: D2.K D3.A
NetD3_K: D3.K D4.A
NetD4_K: D4.K D5.A
NetD6_K: D6.K D7.A
NetD7_K: D7.K D8.A
NetD8_K: D8.K D9.A
NetD9_K: D9.K D10.A
NetJ4_1: J4.1 R1.2 R2.2
NetL1_1: L1.1 LED_DR1.4
NetL2_1: L2.1 LED_DR1.6
NetLED_DR1_12: LED_DR1.12 R3.2
NetQ1_D: Q1.D R6.1 R7.1
NetQ1_G: Q1.G R4.2 R5.2
pads on no net: J1.5 LED_DR1.2 LED_DR1.13

## Polygon pours and split planes (outlines as drawn)
GND on Top Layer "GND_L01_P012" (solid, pour order 12): 31.5,6.5 32.5,5.5 34.5,5.5 35.5,6.5 35.5,8.5 34.5,9.5 32.5,9.5 31.5,8.5
LEDs_2 on Top Layer "LEDS_2_L01_P048" (solid, pour order 48): 156.994,0.996 156.994,14.496 157.494,14.496 160.494,11.496 160.494,3.996 157.494,0.996
LEDs_2_Vin on Top Layer "LEDS_2_VIN_L01_P047" (solid, pour order 47): 80.704,14.5 87.296,14.5 88.796,13 88.796,2.5 87.296,1 80.704,1
LEDs_1 on Top Layer "LEDS_1_L01_P046" (solid, pour order 46): 80,1 73.5,1 72,2.5 72,13 73.5,14.5 80,14.5
LEDs_1_Vin on Top Layer "LEDS_1_VIN_L01_P044" (solid, pour order 44): 3.5,14.5 3.5,1 3,1 0,4 0,11.5 3,14.5
NetD2_K on Top Layer "NETD2_K_L01_P016" (solid, pour order 16): 20.5,2.5 20.5,13 22,14.5 35.5,14.5 37,13 37,2.5 35.5,1 22,1
NetD3_K on Top Layer "NETD3_K_L01_P017" (solid, pour order 17): 37.492,2.508 37.492,13.008 38.992,14.508 52.492,14.508 53.992,13.008 53.992,2.508 52.492,1.008 38.992,1.008
NetD6_K on Top Layer "NETD6_K_L01_P043" (solid, pour order 43): 106.008,12.992 106.008,2.492 104.508,0.992 91.008,0.992 89.508,2.492 89.508,12.992 91.008,14.492 104.508,14.492
NetD7_K on Top Layer "NETD7_K_L01_P041" (solid, pour order 41): 123.008,12.992 123.008,2.492 121.508,0.992 108.008,0.992 106.508,2.492 106.508,12.992 108.008,14.492 121.508,14.492
NetD8_K on Top Layer "NETD8_K_L01_P020" (solid, pour order 20): 140,13 140,2.5 138.5,1 125,1 123.5,2.5 123.5,13 125,14.5 138.5,14.5
NetD9_K on Top Layer "NETD9_K_L01_P019" (solid, pour order 19): 157,1 142,1 140.5,2.5 140.5,13 142,14.5 157,14.5
NetD4_K on Top Layer "NETD4_K_L01_P018" (solid, pour order 18): 54.492,2.508 54.492,13.008 55.992,14.508 69.492,14.508 70.992,13.008 70.992,2.508 69.492,1.008 55.992,1.008
NetD1_K on Top Layer "NETD1_K_L01_P015" (solid, pour order 15): 3.5,14.5 18.5,14.5 20,13 20,2.5 18.5,1 3.5,1
LEDs_1_Vin on Bottom Layer "LEDS_1_VIN_L04_P040" (solid, pour order 40): 29.537,6.863 29.674,7 32.5,7 35.5,4 35.5,1 35,0.5 32.5,0.5 32,1 32,5 31,6 29.729,6 29.529,6.2
LEDs_1 on Bottom Layer "LEDS_1_L04_P024" (solid, pour order 24): 36,6 41.725,6 43.225,7.5 45.5,7.5 46,7 46,1.5 45.5,1 42.338,1 37.814,5.524 37.791,5.5 36,5.5
NetLED_DR1_12 on Bottom Layer "NETLED_DR1_12_L04_P025" (solid, pour order 25): 36,7.5 42,7.5 43,8.5 43,10 42.5,10.5 40,10.5 37.5,8 36,8
LEDs_2 on Bottom Layer "LEDS_2_L04_P026" (solid, pour order 26): 36,9 36,9.5 38,9.5 42.5,14 44.5,14 45.5,13 45.5,12.5 43.5,10.5 40,10.5 38.5,9
NetJ4_1 on Bottom Layer "NETJ4_1_L04_P027" (solid, pour order 27): 43,9.5 51,9.5 51,7.5 48.5,5 46.5,5 43,8.5
LEDs_2 on Bottom Layer "LEDS_2_L04_P033" (solid, pour order 33): 44.5,14 46.5,14 48.5,12 48.5,8.5 47.5,7.5 46.5,7.5 45.5,8.5 45.5,12 44.5,13
GND on Bottom Layer "GND_L04_P042" (solid, pour order 42): 5.25,0.25 cw(c5.25,7.75) 5.25,15.25 155,15.25 cw(c155,7.75) 155,0.25
+VCC on Bottom Layer "+VCC_L04_P037" (solid, pour order 37): 27.15,14.042 27.15,12.8 27.45,12.5 30.5,12.5 31,13 31,14 30.958,14.042
NetQ1_G on Bottom Layer "NETQ1_G_L04_P036" (solid, pour order 36): 73.5,9 75.5,9 76.5,10 89.5,10 90.5,11 90.5,14 89.5,15 74.5,15 73.5,14 73.5,11.5 73,11 73,10 73,9.5
NetQ1_D on Bottom Layer "NETQ1_D_L04_P035" (solid, pour order 35): 64,12.5 66,14.5 67.5,14.5 71,11 71,7 71.5,6.5 74.5,6.5 77,9 94.5,9 95,8.5 95,1.5 94.5,1 66,1 64,3
LEDs on Bottom Layer "LEDS_L04_P034" (solid, pour order 34): 46,13.279 46,1.5 46.5,1 62,1 64,3 64,12.5 62,14.5 47.221,14.5
NetL1_1 on Bottom Layer "NETL1_1_L04_P031" (solid, pour order 31): 29.471,7.8 30.471,7.8 30.971,7.3 30.971,6.3 29.971,5.3 24.8,5.3 20.5,1 18,1 17.5,1.5 17.5,4.329 18.971,5.8 27.638,5.8
+VCC on Bottom Layer "+VCC_L04_P030" (solid, pour order 30): 13,12 18,12 21.5,8.5 31,8.5 31.5,8 31.5,7.5 29.5,7.5 28,6 19,6 14.5,10.5 13,10.5
NetL2_1 on Bottom Layer "NETL2_1_L04_P029" (solid, pour order 29): 24.5,12.5 29,8 31,8 31.5,8.5 31.5,9 29.5,9 26.5,12 26.5,14.185 25.885,14.8 23.415,14.8 23.415,13.085 24,12.5
LEDs_2_Vin on Bottom Layer "LEDS_2_VIN_L04_P028" (solid, pour order 28): 32,13.5 32.5,14 34.5,14 35,13.5 35,10.5 33.5,9 29.5,9 29.5,9.5 31.5,9.5 32,10
GND on GND "GND_L03_P039" (solid, pour order 39): 5.25,0.25 cw(c5.25,7.75) 5.25,15.25 155,15.25 cw(c155,7.75) 155,0.25
LEDs_1_Vin on PWR "LEDS_1_VIN_L02_P032" (solid, pour order 32): 29.537,6.863 29.674,7 32.5,7 35.5,4 35.5,1 35,0.5 32.5,0.5 32,1 32,5 31,6 29.729,6 29.529,6.2
LEDs_2 on PWR "LEDS_2_L02_P001" (solid, pour order 1): 157,1 157,14.5 157.5,14.5 160.5,11.5 160.5,4 157.5,1
LEDs_2_Vin on PWR "LEDS_2_VIN_L02_P021" (solid, pour order 21): 80.704,13.5 84.5,13.5 88.796,9.204 88.796,2.5 87.296,1 80.704,1
LEDs_1 on PWR "LEDS_1_L02_P022" (solid, pour order 22): 80,1 73.5,1 72,2.5 72,9.5 76,13.5 80,13.5
LEDs_1_Vin on PWR "LEDS_1_VIN_L02_P000" (solid, pour order 0): 3.5,14.5 3.5,1 3,1 0,4 0,11.5 3,14.5

## Silkscreen, mask and mechanical layers (free items; w line width, h text height)
Bottom Overlay:
  text "Gerard Pérez & David Redondo - 2022" at 134.497,7.5 h3
  text "Brake Light" at 154.495,7.051 h5
Mechanical 1:
  lines w0.5: 5,15.25 155,15.25 cw(c155,7.75) 155,0.25 5.25,0.25 cw(c5.25,7.75) 5.25,15.25